# Altium PCB HeartLED.PcbDoc (part 1 of 2)
Units mm, origin at the board's own origin, x right, y up, seen from the top; angles counter-clockwise.
Board outline 86.89 x 91.89 mm, 2 copper layers (Top Layer, Bottom Layer); 133 components, 85 nets, 403 pads, 64 vias.
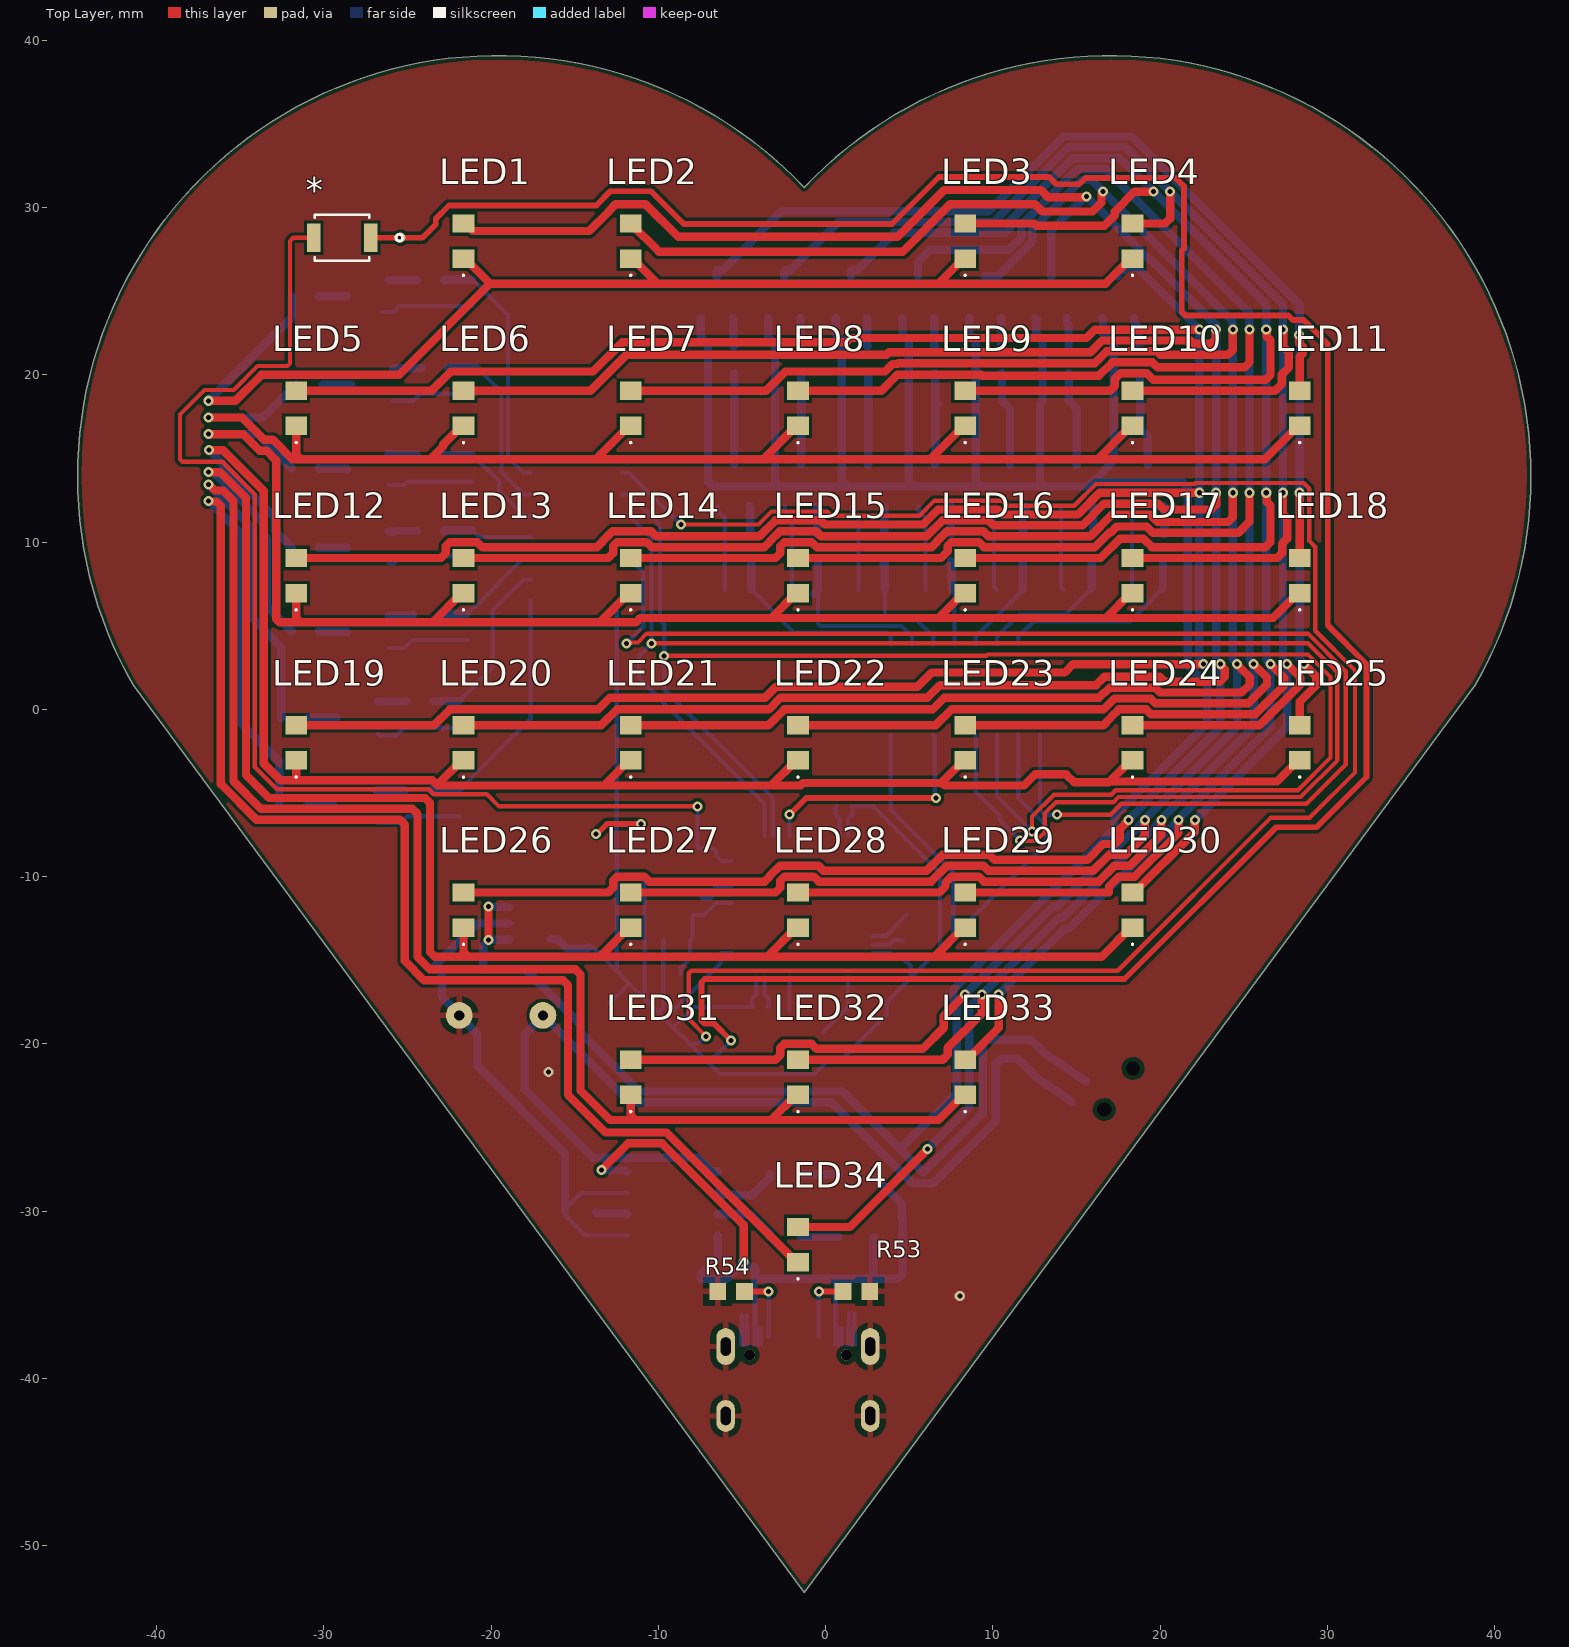
[diagram p0: Top Layer view]
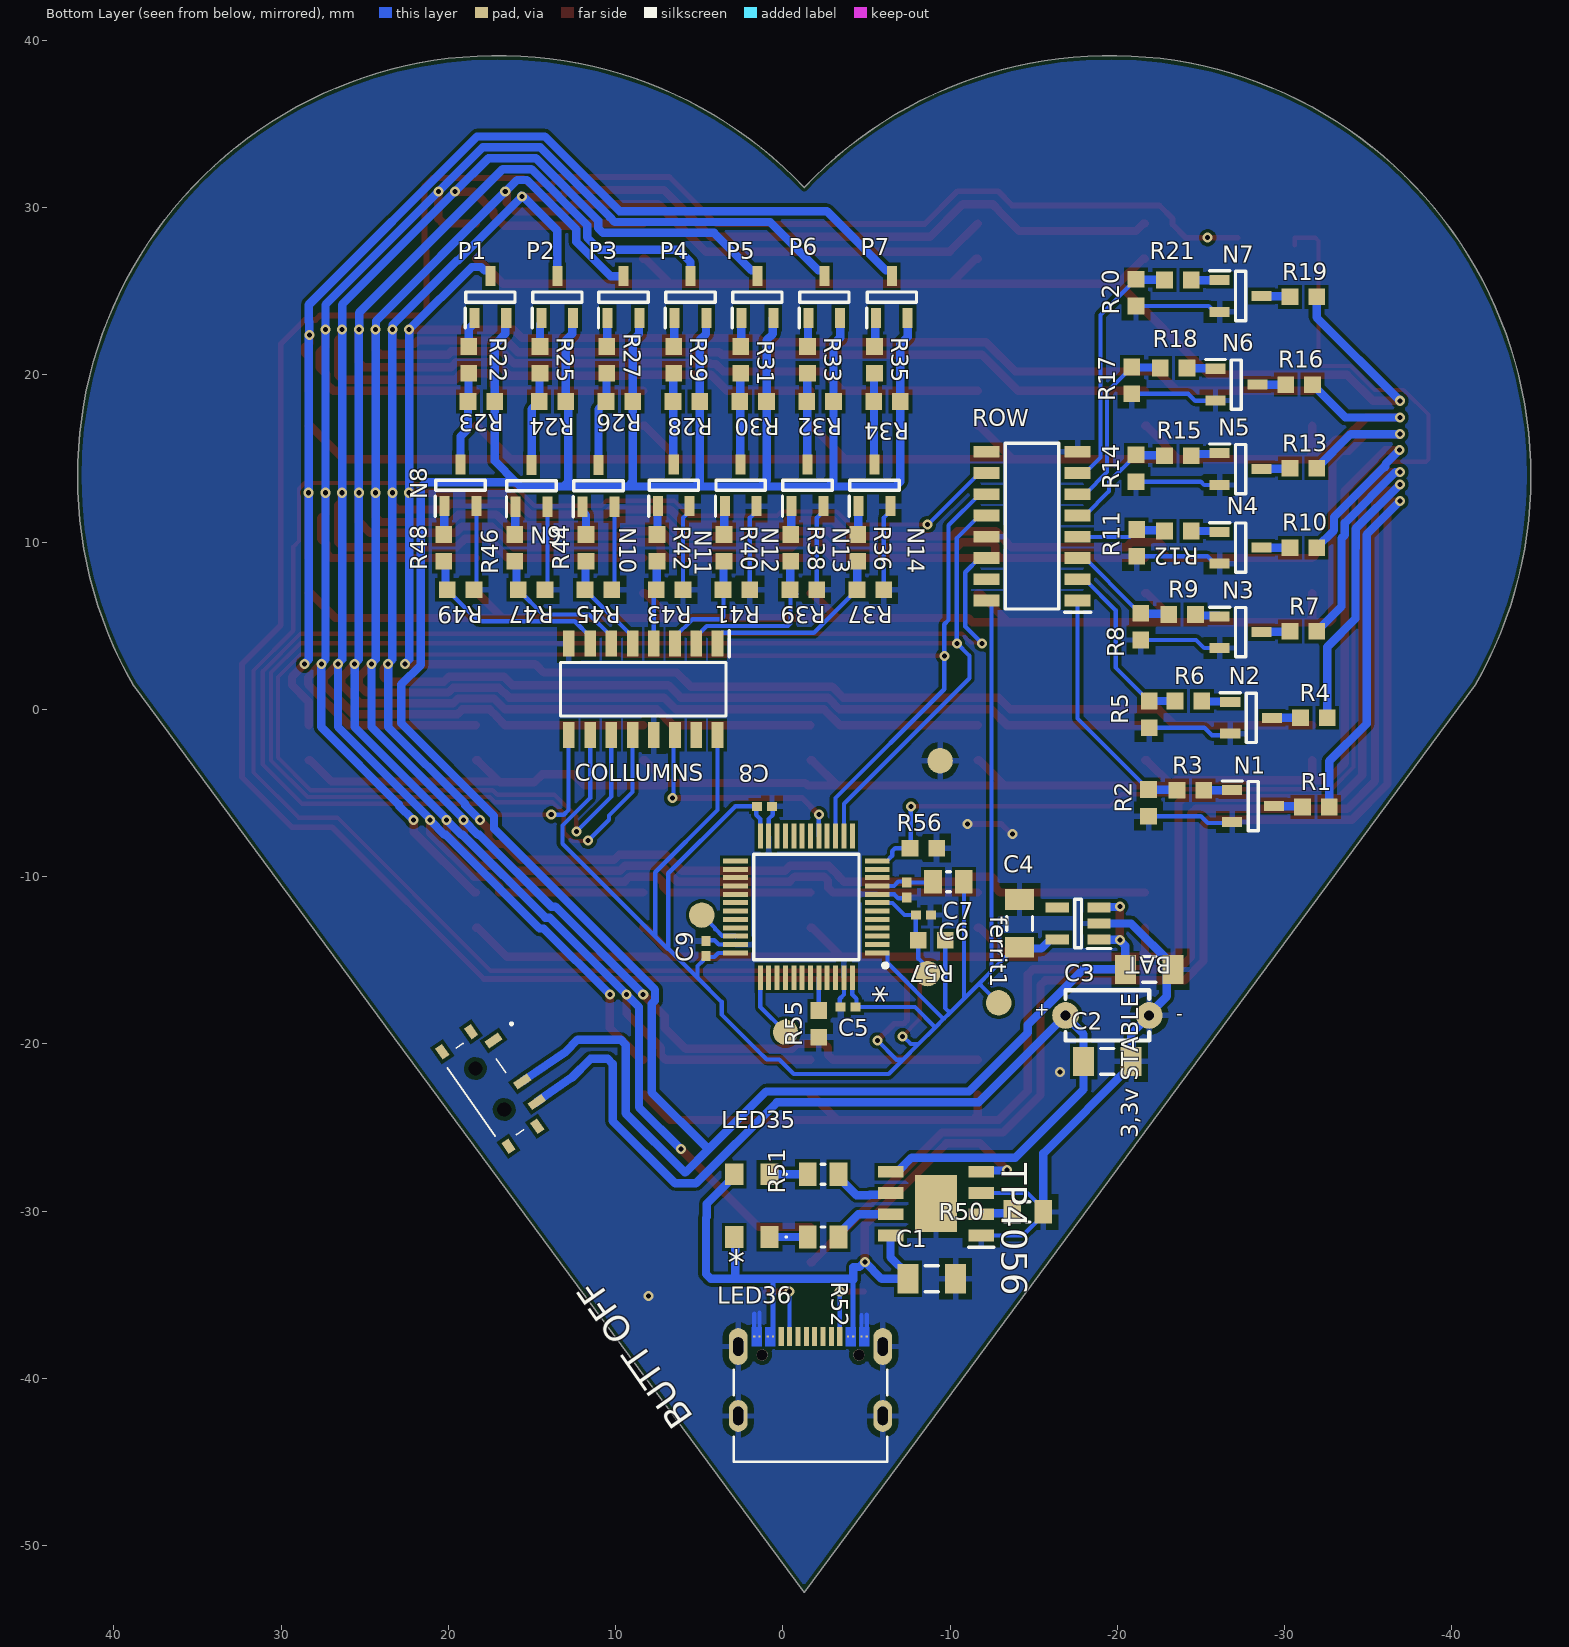
[diagram p1: Bottom Layer view, seen from below]

## Layer stack, top to bottom
Top Solder: solder mask 0.0102, Solder Resist, Dk 3.5
Top Layer: signal copper 0.0356
Dielectric 1: dielectric 0.32, FR-4, Dk 4.8
Bottom Layer: signal copper 0.0356
Bottom Solder: solder mask 0.0102, Solder Resist, Dk 3.5

## Board outline
-1.275,-52.8 -41.4,1.45 cw(c-19.571,13.942) -1.275,31.2 cw(c17.021,13.942) 38.85,1.45

## Design rules (kind name [scope] priority, off if disabled: settings)
AcuteAngle [All] p1: minimum=3.50000000000000E+0001 checktracksonly=FALSE
BoardOutlineClearance "BoardOutlineClearance 1" [All] p1: gap=0.25 ignorepadtopadclearanceinfootprint=FALSE except(0: Arc-SplitContinuation Track-SplitContinuation SMDPad-SplitContinuation THPad-SplitContinuation Via-SplitContinuation Fill-SplitContinuation Poly-SplitContinuation Region-SplitContinuation Text-SplitContinuation) // Milling
BoardOutlineClearance "BoardOutlineClearance 2" [All] p2: gap=0.4 ignorepadtopadclearanceinfootprint=FALSE except(0: Arc-SplitContinuation Track-SplitContinuation SMDPad-SplitContinuation THPad-SplitContinuation Via-SplitContinuation Fill-SplitContinuation Poly-SplitContinuation Region-SplitContinuation Text-SplitContinuation) // V-Cut
Clearance "Clearance-2 1 Oz" [All] p1: gap=0.15 ignorepadtopadclearanceinfootprint=FALSE except(0.2: Arc-Fill Arc-Poly Track-Fill Track-Poly SMDPad-Fill SMDPad-Poly THPad-Fill THPad-Poly Via-Fill Via-Poly Fill-Fill Fill-Poly Poly-Poly; 0.25: Arc-Hole Track-Hole SMDPad-Hole THPad-Hole Via-Hole Fill-Hole Poly-Hole Region-Hole Text-Hole) // Advance
DiffPairsRouting "DiffPairsRouting 1 Oz" [All] p1: maxlimit=0.254 minlimit=0.2 mostfreqgap=0.254 toplayer_minwidth=0.2 toplayer_maxwidth=0.381 toplayer_prefwidth=0.381 bottomlayer_minwidth=0.2 bottomlayer_maxwidth=0.381 bottomlayer_prefwidth=0.381 maxuncoupledlength=12.7
DiffPairsRouting "DiffPairsRouting 1/2 Oz" [All] p2: maxlimit=0.254 minlimit=0.1 mostfreqgap=0.254 toplayer_minwidth=0.1 toplayer_maxwidth=0.381 toplayer_prefwidth=0.381 bottomlayer_minwidth=0.1 bottomlayer_maxwidth=0.381 bottomlayer_prefwidth=0.381 maxuncoupledlength=12.7
HoleSize "Minimum HoleSize" [IsPad] p1: absolutevalues=TRUE maxlimit=5.9 minlimit=0.6 maxpercent=80.000 minpercent=20.000
HoleSize "Minimum HoleSize VIA 1" [IsVia] p2: absolutevalues=TRUE maxlimit=5.9 minlimit=0.3 maxpercent=80.000 minpercent=20.000 // Standart
HoleSize "Minimum HoleSize VIA 2" [IsVia] p3: absolutevalues=TRUE maxlimit=5.9 minlimit=0.2 maxpercent=80.000 minpercent=20.000 // Advance
HoleToHoleClearance Hole2HoleClearance [All] p1: gap=0.25 allowstackedmicrovias=FALSE
MinimumAnnularRing "Minimum AR VIA Standart" [IsVia] p1: minimumring=0.15
MinimumAnnularRing "Minimum AR PAD Standart" [IsPAD] p2: minimumring=0.2
MinimumAnnularRing "Minimum AR VIA Advance" [IsVia] p3: minimumring=0.1
MinimumAnnularRing "Minimum AR PAD Advance" [IsPAD] p4: minimumring=0.15
MinimumSolderMaskSliver "SolderMask Bridge Standart" [All] p1: minsoldermaskwidth=0.15 // All Masks
MinimumSolderMaskSliver "SolderMask Bridge Advance" [All] p2: minsoldermaskwidth=0.1 // Mask LDI
PlaneClearance "PlaneClearance 1 Oz" [All] p1: clearance=0.2
PlaneConnect "TermalConnect-2 1 Oz" [All] p1: pad.planeconnectstyle=Relief pad.reliefexpansion=0.15 pad.reliefentries=4 pad.reliefconductorwidth=0.2 pad.reliefairgap=0.2 via.planeconnectstyle=Direct via.reliefexpansion=0.15 via.reliefentries=4 via.reliefconductorwidth=0.15 via.reliefairgap=0.15 // Advance
PolygonConnect "PolygonConnect 3 Oz" [All] p1: thpad.connectstyle=Relief thpad.reliefconductorwidth=0.35 thpad.reliefentries=4 thpad.polygonreliefangle="90 Angle" thpad.airgapwidth=0.35 smdpad.connectstyle=Relief smdpad.reliefconductorwidth=0.35 smdpad.reliefentries=4 smdpad.polygonreliefangle="90 Angle" smdpad.airgapwidth=0.35 via.connectstyle=Direct via.reliefconductorwidth=0.254 via.reliefentries=4 via.polygonreliefangle="90 Angle" via.airgapwidth=0.254
PolygonConnect "PolygonConnect 2 Oz" [All] p2: thpad.connectstyle=Relief thpad.reliefconductorwidth=0.3 thpad.reliefentries=4 thpad.polygonreliefangle="90 Angle" thpad.airgapwidth=0.3 smdpad.connectstyle=Relief smdpad.reliefconductorwidth=0.3 smdpad.reliefentries=4 smdpad.polygonreliefangle="90 Angle" smdpad.airgapwidth=0.3 via.connectstyle=Direct via.reliefconductorwidth=0.254 via.reliefentries=4 via.polygonreliefangle="90 Angle" via.airgapwidth=0.254
PolygonConnect "PolygonConnect-1 1 Oz" [All] p3: thpad.connectstyle=Relief thpad.reliefconductorwidth=0.2 thpad.reliefentries=4 thpad.polygonreliefangle="90 Angle" thpad.airgapwidth=0.2 smdpad.connectstyle=Relief smdpad.reliefconductorwidth=0.2 smdpad.reliefentries=4 smdpad.polygonreliefangle="90 Angle" smdpad.airgapwidth=0.2 via.connectstyle=Direct via.reliefconductorwidth=0.254 via.reliefentries=4 via.polygonreliefangle="90 Angle" via.airgapwidth=0.254 // Standart
PolygonConnect "PolygonConnect-2 1 Oz" [All] p4: thpad.connectstyle=Relief thpad.reliefconductorwidth=0.15 thpad.reliefentries=4 thpad.polygonreliefangle="90 Angle" thpad.airgapwidth=0.15 smdpad.connectstyle=Relief smdpad.reliefconductorwidth=0.15 smdpad.reliefentries=4 smdpad.polygonreliefangle="90 Angle" smdpad.airgapwidth=0.15 via.connectstyle=Direct via.reliefconductorwidth=0.254 via.reliefentries=4 via.polygonreliefangle="90 Angle" via.airgapwidth=0.254 // Advance
PolygonConnect "PolygonConnect-1 1/2 Oz" [All] p5: thpad.connectstyle=Relief thpad.reliefconductorwidth=0.15 thpad.reliefentries=4 thpad.polygonreliefangle="90 Angle" thpad.airgapwidth=0.2 smdpad.connectstyle=Relief smdpad.reliefconductorwidth=0.2 smdpad.reliefentries=4 smdpad.polygonreliefangle="90 Angle" smdpad.airgapwidth=0.2 via.connectstyle=Direct via.reliefconductorwidth=0.254 via.reliefentries=4 via.polygonreliefangle="90 Angle" via.airgapwidth=0.254 // Standart
PolygonConnect "PolygonConnect-2 1/2 Oz" [All] p6: thpad.connectstyle=Relief thpad.reliefconductorwidth=0.125 thpad.reliefentries=4 thpad.polygonreliefangle="90 Angle" thpad.airgapwidth=0.15 smdpad.connectstyle=Relief smdpad.reliefconductorwidth=0.125 smdpad.reliefentries=4 smdpad.polygonreliefangle="90 Angle" smdpad.airgapwidth=0.15 via.connectstyle=Direct via.reliefconductorwidth=0.254 via.reliefentries=4 via.polygonreliefangle="90 Angle" via.airgapwidth=0.254 // Advance
RoutingCorners [All] p1 off: cornerstyle=45-Degree minsetback=2.54 maxsetback=2.54
RoutingVias [All] p1: holewidth=0.3 width=0.6 viastyle="Through Hole" minholewidth=0.2 minwidth=0.4 maxholewidth=5.9 maxwidth=6.4
SilkToSilkClearance Silk2SilkClearance [All] p1 off: silktosilkclearance=0.15
SilkToSolderMaskClearance Silk2SolderMaskClearance [IsPad] p1 off: minsilkscreentomaskgap=0.15 clearancetoexposedcopper=TRUE
SolderMaskExpansion SolderMaskExpansion-1 [All] p1: expansion=0.05 istentingtop=FALSE // Standart
SolderMaskExpansion "SolderMaskExpansion LDI" [All] p2: expansion=0.025 istentingtop=FALSE // Advance
SupplyNets "Schematic Supply Nets_2" [InNet('+3.7v')] p1: voltage=0.000
SupplyNets "Schematic Supply Nets_1" [InNet('GND')] p2: voltage=0.000
SupplyNets "Schematic Supply Nets" [InNet('+3.3v')] p3: voltage=0.000
UnRoutedNet [All] p1: checkbadconnections=TRUE
Width "Width 1 Oz" [All] p1: maxlimit=10 minlimit=0.15 preferedwidth=0.2 checkconnectedcopper=TRUE
20 further rules are at their usual default settings.

## Components (designator, comment, footprint, x,y, rotation, side; value= is the part's Value field where it differs from the comment)
"3,3v STABLE" "ME6212C33M5G" ME6212C33M5G/3.3 -17.65,-12.8 r0 bottom
* "STM32F103C8T6" STM32F103C8T6 -1.4,-11.812 r0 bottom
* "TYPE-C" USB-C -1.65,-41.05 r180 bottom
* "B3U-1000P BUTTON MOD" "B3U-1000P BUTTON MOD" -28.9,28.2 r180 top
BAT "BATTERY" BATTERY -19.4,-18.3 r180 bottom
"BUTT OFF" "MSK12C02 BUTTON" "MSK12C02 BUTTON" 17.525,-22.7 r235 bottom
C1 "10 мкФ" C1206 -8.9,-34.05 r0 bottom
C2 "10 мкФ" C1206 -19.4,-21.05 r0 bottom
C3 "10 мкФ" C1206 -21.9,-15.55 r0 bottom
C4 "10 мкФ" C1206 -14.15,-12.8 r270 bottom
C5 "0.1 мкФ" C0402 -3.9,-17.8 r0 bottom
C6 "0.1 мкФ" C0402 -8.4,-12.3 r180 bottom
C7 "0.1 мкФ" C0402 -7.4,-10.8 r270 bottom
C8 "0.1 мкФ" C0402 1.1,-5.8 r0 bottom
C9 "0.1 мкФ" C0402 4.6,-14.3 r270 bottom
COLLUMNS "74HC595D" 74HC595D 8.35,1.2 r270 bottom
ferrit1 "ferrit" R0805 -9.9,-10.3 r0 bottom value="1 Ом"
LED1 "LED_RED" LED_RED -21.65,28 r90 top
LED2 "LED_RED" LED_RED -11.65,28 r90 top
LED3 "LED_RED" LED_RED 8.35,28 r90 top
LED4 "LED_RED" LED_RED 18.35,28 r90 top
LED5 "LED_RED" LED_RED -31.65,18 r90 top
LED6 "LED_RED" LED_RED -21.65,18 r90 top
LED7 "LED_RED" LED_RED -11.65,18 r90 top
LED8 "LED_RED" LED_RED -1.65,18 r90 top
LED9 "LED_RED" LED_RED 8.35,18 r90 top
LED10 "LED_RED" LED_RED 18.35,18 r90 top
LED11 "LED_RED" LED_RED 28.35,18 r90 top
LED12 "LED_RED" LED_RED -31.65,8 r90 top
LED13 "LED_RED" LED_RED -21.65,8 r90 top
LED14 "LED_RED" LED_RED -11.65,8 r90 top
LED15 "LED_RED" LED_RED -1.65,8 r90 top
LED16 "LED_RED" LED_RED 8.35,8 r90 top
LED17 "LED_RED" LED_RED 18.35,8 r90 top
LED18 "LED_RED" LED_RED 28.35,8 r90 top
LED19 "LED_RED" LED_RED -31.65,-2 r90 top
LED20 "LED_RED" LED_RED -21.65,-2 r90 top
LED21 "LED_RED" LED_RED -11.65,-2 r90 top
LED22 "LED_RED" LED_RED -1.65,-2 r90 top
LED23 "LED_RED" LED_RED 8.35,-2 r90 top
LED24 "LED_RED" LED_RED 18.35,-2 r90 top
LED25 "LED_RED" LED_RED 28.35,-2 r90 top
LED26 "LED_RED" LED_RED -21.65,-12 r90 top
LED27 "LED_RED" LED_RED -11.65,-12 r90 top
LED28 "LED_RED" LED_RED -1.65,-12 r90 top
LED29 "LED_RED" LED_RED 8.35,-12 r90 top
LED30 "LED_RED" LED_RED 18.35,-12 r90 top
LED31 "LED_RED" LED_RED -11.65,-22 r90 top
LED32 "LED_RED" LED_RED -1.65,-22 r90 top
LED33 "LED_RED" LED_RED 8.35,-22 r90 top
LED34 "LED_RED" LED_RED -1.65,-32 r90 top
LED35 "LED_RED" LED_RED 1.85,-27.8 r0 bottom
LED36 "LED_RED" LED_RED 1.85,-31.55 r0 bottom
N1 "A03400 n-channel" A03400 -28.114,-5.786 r180 bottom
N2 "A03400 n-channel" A03400 -27.996,-0.504 r180 bottom
N3 "A03400 n-channel" A03400 -27.364,4.614 r180 bottom
N4 "A03400 n-channel" A03400 -27.364,9.664 r180 bottom
N5 "A03400 n-channel" A03400 -27.364,14.364 r180 bottom
N6 "A03400 n-channel" A03400 -27.114,19.414 r180 bottom
N7 "A03400 n-channel" A03400 -27.364,24.714 r180 bottom
N8 "A03400 n-channel" A03400 19.275,13.4 r90 bottom
N9 "A03400 n-channel" A03400 15.025,13.364 r90 bottom
N10 "A03400 n-channel" A03400 11.025,13.364 r90 bottom
N11 "A03400 n-channel" A03400 6.525,13.4 r90 bottom
N12 "A03400 n-channel" A03400 2.525,13.4 r90 bottom
N13 "A03400 n-channel" A03400 -1.475,13.4 r90 bottom
N14 "A03400 n-channel" A03400 -5.475,13.4 r90 bottom
P1 "AO3401 p-channel" AO3401 17.489,24.65 r90 bottom
P2 "AO3401 p-channel" AO3401 13.489,24.65 r90 bottom
P3 "AO3401 p-channel" AO3401 9.525,24.65 r90 bottom
P4 "AO3401 p-channel" AO3401 5.525,24.65 r90 bottom
P5 "AO3401 p-channel" AO3401 1.525,24.65 r90 bottom
P6 "AO3401 p-channel" AO3401 -2.475,24.65 r90 bottom
P7 "AO3401 p-channel" AO3401 -6.511,24.65 r90 bottom
R1 "240 Ом" R0603 -31.864,-5.836 r180 bottom value="160 Ом"
R2 "10 кОм" R0603 -21.864,-5.586 r90 bottom
R3 "100 Ом" R0603 -24.364,-4.836 r180 bottom
R4 "240 Ом" R0603 -31.746,-0.504 r180 bottom value="160 Ом"
R5 "10 кОм" R0603 -21.9,-0.3 r90 bottom
R6 "100 Ом" R0603 -24.246,0.496 r180 bottom
R7 "240 Ом" R0603 -31.114,4.664 r180 bottom value="160 Ом"
R8 "10 кОм" R0603 -21.4,4.95 r90 bottom
R9 "100 Ом" R0603 -23.864,5.664 r180 bottom
R10 "240 Ом" R0603 -31.114,9.664 r180 bottom value="160 Ом"
R11 "10 кОм" R0603 -21.15,9.95 r90 bottom
R12 "100 Ом" R0603 -23.614,10.664 r180 bottom
R13 "240 Ом" R0603 -31.114,14.414 r180 bottom value="160 Ом"
R14 "10 кОм" R0603 -21.114,14.414 r90 bottom
R15 "100 Ом" R0603 -23.614,15.164 r180 bottom
R16 "240 Ом" R0603 -30.864,19.414 r180 bottom value="160 Ом"
R17 "10 кОм" R0603 -20.864,19.664 r90 bottom
R18 "100 Ом" R0603 -23.364,20.414 r0 bottom
R19 "240 Ом" R0603 -31.114,24.664 r180 bottom value="160 Ом"
R20 "10 кОм" R0603 -21.114,24.914 r90 bottom
R21 "100 Ом" R0603 -23.614,25.664 r180 bottom
R22 "100 Ом" R0603 18.775,20.9 r270 bottom
R23 "10 кОм" R0603 18.025,18.4 r0 bottom
R24 "10 кОм" R0603 13.775,18.4 r0 bottom
R25 "100 Ом" R0603 14.525,20.9 r270 bottom
R26 "10 кОм" R0603 9.775,18.4 r0 bottom
R27 "100 Ом" R0603 10.525,20.9 r270 bottom
R28 "10 кОм" R0603 5.775,18.4 r0 bottom
R29 "100 Ом" R0603 6.525,20.9 r270 bottom
R30 "10 кОм" R0603 1.775,18.4 r0 bottom
R31 "100 Ом" R0603 2.525,20.9 r270 bottom
R32 "10 кОм" R0603 -2.225,18.4 r0 bottom
R33 "100 Ом" R0603 -1.475,20.9 r270 bottom
R34 "10 кОм" R0603 -6.225,18.4 r0 bottom
R35 "100 Ом" R0603 -5.475,20.9 r270 bottom
R36 "100 Ом" R0603 -4.475,9.65 r270 bottom
R37 "10 кОм" R0603 -5.225,7.15 r0 bottom
R38 "100 Ом" R0603 -0.475,9.65 r270 bottom
R39 "10 кОм" R0603 -1.225,7.15 r0 bottom
R40 "100 Ом" R0603 3.525,9.65 r270 bottom
R41 "10 кОм" R0603 2.775,7.15 r0 bottom
R42 "100 Ом" R0603 7.525,9.65 r270 bottom
R43 "10 кОм" R0603 6.775,7.15 r0 bottom
R44 "100 Ом" R0603 11.775,9.65 r270 bottom
R45 "10 кОм" R0603 11.025,7.15 r0 bottom
R46 "100 Ом" R0603 16.025,9.65 r270 bottom
R47 "10 кОм" R0603 15.025,7.15 r0 bottom
R48 "100 Ом" R0603 20.275,9.65 r270 bottom
R49 "10 кОм" R0603 19.275,7.15 r0 bottom
R50 "4.7 кОм" R0805 -14.65,-30.05 r180 bottom
R51 "1 кОм" R0805 -2.4,-27.8 r180 bottom
R52 "1 кОм" R0805 -2.4,-31.55 r180 bottom
R53 "5.1 кОм" R0603 1.85,-34.8 r0 top
R54 "5.1 кОм" R0603 -5.65,-34.8 r0 top
R55 "10 кОм" R0603 -2.15,-18.8 r90 bottom
R56 "10 кОм" R0603 -8.4,-8.3 r0 bottom
R57 "10 кОм" R0603 -8.9,-13.8 r0 bottom
ROW "74HC595D" 74HC595D -14.9,10.95 r0 bottom
TP4056 "TP4056" TP4056 -9.15,-29.55 r0 bottom

## Footprints (in the part's own frame and the unit in brackets; to place one, negate y for a bottom-side part, rotate by r counter-clockwise, add the part's x,y. Pads: shape width x height; smd on the part's side, far side on the other; paste and mask are expansions set on the pad)
74HC595D [mm]
  rect 1.55x0.7 smd: 1(-2.725,4.445) 2(-2.725,3.175) 3(-2.725,1.905) 4(-2.725,0.635) 5(-2.725,-0.635) 6(-2.725,-1.905) 7(-2.725,-3.175) 8(-2.725,-4.445) 9(2.725,-4.445) 10(2.725,-3.175) 11(2.725,-1.905) 12(2.725,-0.635) 13(2.725,0.635) 14(2.725,1.905) 15(2.725,3.175) 16(2.725,4.445)
  silkscreen extent -3.5,-4.95 1.6,5.15
A03400 [mm]
  rect 1.2x0.6 smd: 1(-1.25,0.95) 2(-1.25,-0.95) 3(1.25,0)
  silkscreen extent -1.85,-1.48 0.3,1.5
AO3401 [mm]
  rect 1.2x0.6 smd: 1(-1.25,0.95) 2(-1.25,-0.95) 3(1.25,0)
  silkscreen extent -1.85,-1.48 0.3,1.5
"B3U-1000P BUTTON MOD" [mm]
  rect 0.8x1.7 smd paste+0 mask+0: 1(-1.7,0) 2(1.7,0)
  silkscreen extent -3.61,-1.38 1.63,1.38
BATTERY [mm]
  round 1.6 hole 0.6: 1(-2.5,0) 2(2.5,0)
  silkscreen extent -2.5,-1.5 2.5,1.5
C0402 [mm]
  rect 0.6x0.55 smd: 1(-0.45,0) 2(0.45,0)
  body extent -0.55,-0.27 0.55,0.28, height 0.4
C1206 [mm]
  rect 1.25x1.75 smd: 1(-1.425,0) 2(1.425,0)
  silkscreen extent -0.4,-0.77 0.4,0.77, body extent -1.6,-0.85 1.6,0.85, height 0.6
LED_RED [mm]
  rect 1.1x1.3 smd: 1(-1.05,0) 2(1.05,0)
  silkscreen extent -2.1,-0.05 -2,0.05
ME6212C33M5G/3.3 [mm]
  rect 1.4x0.6 smd: 1(-1.25,0.95) 2(-1.25,0) 3(-1.25,-0.95) 4(1.25,-0.95) 5(1.25,0.95)
  silkscreen extent -1.95,-1.45 0.2,1.5
"MSK12C02 BUTTON" [mm]
  rect 0.5x1 smd: A1(-2.25,1.85) B1(0.75,1.85) C1(2.25,1.85)
  round 0.425 hole 0.85 unplated: MH1(-1.5,0) MH2(1.5,0)
  rect 0.8x0.5 smd: MP1(3.45,1.05) MP2(3.45,-1.05) MP3(-3.45,-1.05) MP4(-3.45,1.05)
  silkscreen extent -3.15,-1.35 3.15,3.35
R0603 [mm]
  rect 1x1 smd: 1(-0.8,0) 2(0.8,0)
  body extent -0.85,-0.48 0.85,0.47, height 0.5
R0805 [mm] "Chip Resistor, 2-Leads, Body 2,10x1,30mm, IPC Medium Density"
  rect 1.05x1.4 smd: 1(-0.925,0) 2(0.925,0)
  silkscreen extent -0.1,-0.6 0.1,0.6, body extent -1.15,-0.7 1.15,0.7, height 0.76
STM32F103C8T6 [mm]
  rect 1.475x0.3 smd: 1(-4.238,2.75) 2(-4.238,2.25) 3(-4.238,1.75) 4(-4.238,1.25) 5(-4.238,0.75) 6(-4.238,0.25) 7(-4.238,-0.25) 8(-4.238,-0.75) 9(-4.238,-1.25) 10(-4.238,-1.75) 11(-4.238,-2.25) 12(-4.238,-2.75) 25(4.238,-2.75) 26(4.238,-2.25) 27(4.238,-1.75) 28(4.238,-1.25) 29(4.238,-0.75) 30(4.238,-0.25) 31(4.238,0.25) 32(4.238,0.75) 33(4.238,1.25) 34(4.238,1.75) 35(4.238,2.25) 36(4.238,2.75)
  rect 0.3x1.475 smd: 13(-2.75,-4.238) 14(-2.25,-4.238) 15(-1.75,-4.238) 16(-1.25,-4.238) 17(-0.75,-4.238) 18(-0.25,-4.238) 19(0.25,-4.238) 20(0.75,-4.238) 21(1.25,-4.238) 22(1.75,-4.238) 23(2.25,-4.238) 24(2.75,-4.238) 37(2.75,4.238) 38(2.25,4.238) 39(1.75,4.238) 40(1.25,4.238) 41(0.75,4.238) 42(0.25,4.238) 43(-0.25,4.238) 44(-0.75,4.238) 45(-1.25,4.238) 46(-1.75,4.238) 47(-2.25,4.238) 48(-2.75,4.238)
  silkscreen extent -4.85,-3.15 3.15,3.62
TP4056 [mm]
  rect 1.525x0.7 smd: 1(-2.712,1.905) 2(-2.712,0.635) 3(-2.712,-0.635) 4(-2.712,-1.905) 5(2.712,-1.905) 6(2.712,-0.635) 7(2.712,0.635) 8(2.712,1.905)
  rect 2.513x3.402 smd: 9(0,0)
  silkscreen extent -3.47,2.61 -1.95,2.61
USB-C [mil]
  round 26 / inner round 60 / far side round 26 hole 26 unplated paste-99999 mask+0: 29(-113.78,96.55) 30(113.78,96.55)
  rect 5x5 smd paste-2.5 mask-2.5: A1(-132.3,139.5) A4(-100.61,139.5) A9(100.61,139.5) A12(132.3,139.5) B1(120.3,139.5) B4(88.61,139.5) B9(-88.61,139.5) B12(-120.3,139.5)
  rect 12x45 smd paste+0 mask+0: A5(-49.22,139.5) A6(-9.85,139.5) A7(9.84,139.5) A8(-68.91,139.5) B5(68.91,139.5) B6(29.53,139.5) B7(-29.54,139.5) B8(49.22,139.5)
  oval 44x87 / inner round 60 / far side oval 44x87 hole 23.62 slot 43.31 at 90 deg paste-99999 mask+0: S1(-170.08,116.23) S2(170.08,116.23)
  oval 44x75 / inner round 60 / far side oval 44x75 hole 23.62 slot 43.31 at 90 deg paste-99999 mask+0: S3(-170.08,-47.15) S4(170.08,-47.15)
  Top Layer region: -114.3,117 -138.3,117 -138.3,162 -114.3,162
  Top Layer region: 114.3,162 138.3,162 138.3,117 114.3,117
  Top Layer region: 82.61,162 106.61,162 106.61,117 82.61,117
  Top Layer region: -106.61,117 -106.61,162 -82.61,162 -82.61,117
  silkscreen extent -181,-155 181,61

## Part data
C1 C2 C3 C4: library part "10 мкФ 1% X7R 10В 1206", "1206 X5R", Power/Voltage=10В, PrimaryValue=10, Tolerance=1%, UnitsValue=мкФ, ID=CCS00422, Part Number="10 мкФ 1% X7R 10В 1206", Type=X7R, Корпус=1206
C5 C6 C7 C8 C9: library part "0.1 мкФ 10% X7R 16В 0402", "0402", Power/Voltage=16В, PrimaryValue=0.1, Tolerance=10%, UnitsValue=мкФ, ID=CCS00423, Part Number="0.1 мкФ 10% X7R 16В 0402", Type=X7R, Корпус=0402
ferrit1: library part "1 Ом 1% 0.125 Вт 0805", "0805", Power/Voltage="0.125 Вт", PrimaryValue=1, Tolerance=1%, UnitsValue=Ом, ID=RS00193, Part Number="1 Ом 1% 0.125 Вт 0805", Корпус=0805
R1 R4 R7 R10 R13 R16 R19: library part "160 Ом 1% 0.063 Вт 0603", "0603", Power/Voltage="0.063 Вт", PrimaryValue=160, Tolerance=1%, UnitsValue=Ом, ID=RS00150, Part Number="160 Ом 1% 0.063 Вт 0603", Корпус=0603
R2 R5 R8 R11 R14 R17 R20 R23 R24 R26 R28 R30 R32 R34 R37 R39 R41 R43 R45 R47 R49 R55 R56 R57: library part "10 кОм 1% 0.063 Вт 0603", "0603", Power/Voltage="0.063 Вт", PrimaryValue=10, Tolerance=1%, UnitsValue=кОм, ID=RS00097, Part Number="10 кОм 1% 0.063 Вт 0603", Корпус=0603
R3 R6 R9 R12 R15 R18 R21 R22 R25 R27 R29 R31 R33 R35 R36 R38 R40 R42 R44 R46 R48: library part "100 Ом 1% 0.063 Вт 0603", "0603", Power/Voltage="0.063 Вт", PrimaryValue=100, Tolerance=1%, UnitsValue=Ом, ID=RS00145, Part Number="100 Ом 1% 0.063 Вт 0603", Корпус=0603
R50: library part "4.7 кОм 1% 0.125 Вт 0805", "0805", Power/Voltage="0.125 Вт", PrimaryValue=4.7, Tolerance=1%, UnitsValue=кОм, ID=RS00233, Part Number="4.7 кОм 1% 0.125 Вт 0805", Корпус=0805
R51 R52: library part "1 кОм 1% 0.125 Вт 0805", "0805", Power/Voltage="0.125 Вт", PrimaryValue=1, Tolerance=1%, UnitsValue=кОм, ID=RS00217, Part Number="1 кОм 1% 0.125 Вт 0805", Корпус=0805
R53 R54: library part "5.1 кОм 1% 0.063 Вт 0603", "1206", Power/Voltage="0.063 Вт", PrimaryValue=5.1, Tolerance=1%, UnitsValue=кОм, ID=RS00042, Part Number="5.1 кОм 1% 0.063 Вт 0603", Корпус=0603

## Free pads (board coordinates)
  round 1.5 smd far side: 4(-0.15,-19.3)
  round 1.524 smd far side: 5(-8.65,-15.8) 6(4.85,-12.3) 7(-12.9,-17.55) 8(-9.4,-3.075)

## Via types
v1: diameter 0.6, hole 0.3, Top Layer to Bottom Layer, 64 vias

## Nets (pads, with @x,y where several pads share a name; then routed paths per layer and width w, separated by ;. In a path a pad name is that pad's centre, name@x,y a point inside that pad or via, vN(x,y) a via of type N, cw(c..) or ccw(c..) an arc to the next point about the centre after c; other vN are vias at no path point)
+3.3v: "3,3v STABLE.5" *.1 *.24 *.36 *.48 C4.2 C5.1 C8.2 C9.2 COLLUMNS.10 COLLUMNS.16 ferrit1.1 pad.7 R57.1 ROW.10 ROW.16 | length 385.2
  Top Layer w0.254: v1(-8.65,11.05) -3.999,11.05 -3.222,11.827 0.102,11.827 0.35,11.579 5.61,11.579 6.508,12.477 10.55,12.477 10.85,12.177 14.868,12.177 16.168,13.477 22.061,13.477 22.111,13.527 28.589,13.527 28.927,13.189 28.927,10.065 29.277,9.715 29.277,4.702 31.65,2.329 31.65,-3.775 28.95,-6.475 26.625,-6.475 17.472,-15.628 -8.029,-15.628 -8.178,-15.777 -8.178,-18.522 v1(-7.15,-19.55)
  Top Layer w0.35: *.1@-27.2,28.2 v1(-25.4,28.2) -24.092,28.2 -23.305,28.987 -23.305,29.338 -22.517,30.125 -13.7,30.125 -13.7,30.145 -12.87,30.975 -10.43,30.975 -8.48,29.025 3.978,29.025 6.778,31.825 13.367,31.825 13.8,31.392 15.158,31.392 15.541,31.775 20.942,31.775 21.425,31.292 21.425,27.553 21.3,27.428 21.3,23.755 21.505,23.55 27.667,23.55 27.94,23.277 28.589,23.277 30.025,21.841 30.025,5.025 32.35,2.7 32.35,-4.05 29.35,-7.05 26.95,-7.05 17.875,-16.125 -7.22,-16.125 -7.425,-16.33 -7.425,-18.595 -7.22,-18.8 -6.65,-18.8 v1(-5.65,-19.8)
  Bottom Layer w0.254: C4.2@-14.15,-14.225 -13.9,-14.225 -12.477,-15.648 ; pad.7@-12.9,-17.55 -11.824,-16.474 -11.651,-16.474 ; ROW.16@-12.175,6.505 -12.254,6.505 -12.477,6.282 -12.477,-15.648 ; ROW.10@-12.175,14.125 -11.75,14.125 -8.675,11.05 v1(-8.65,11.05) ; ferrit1.1@-10.825,-10.3 -10.825,-17.3 ; R57.1@-9.7,-13.8 -9.7,-17.85 -9.988,-18.137 ; v1(-7.15,-19.55) -7.188,-19.55 -7.651,-20.012 -8.112,-20.012 ; v1(-5.65,-19.8) -6.8,-20.95 -7.175,-20.95 ; *.1@-5.638,-14.562 -6.226,-14.562 -6.249,-14.585 -6.249,-15.149 -9.612,-18.513 ; *.48@-4.15,-16.05 -4.15,-17.05 -4.4,-17.3 -4.4,-17.75 C5.1@-4.35,-17.8 -7.9,-17.8 -9.112,-19.012 ; *.24@1.35,-7.574 1.35,-6.55 1.6,-6.3 C8.2@1.6,-5.85 ; C8.2@1.55,-5.8 C8.2@1.6,-5.85 ; *.36@2.838,-14.562 3.862,-14.562 4.1,-14.8 4.55,-14.8 C9.2@4.6,-14.75 ; COLLUMNS.16@3.905,-1.525 3.905,-6.014 7.633,-9.742 7.633,-13.583 ; C9.2@4.625,-14.8 4.748,-14.923 4.748,-14.998 5.1,-15.35 5.1,-16.05 ; 6.883,-14.333 7.633,-13.583 ; COLLUMNS.10@11.525,-1.525 11.525,-5.296 13.177,-6.948 13.177,-8.039 7.633,-13.583 ; -12.477,-15.648 -11.651,-16.474 ; -11.651,-16.474 -10.825,-17.3 ; -10.825,-17.3 -9.988,-18.137 ; -9.988,-18.137 -9.612,-18.513 ; -9.612,-18.513 -9.112,-19.012 ; -9.112,-19.012 -8.112,-20.012 ; -8.112,-20.012 -7.175,-20.95 ; -7.175,-20.95 -6.325,-21.8 -0.65,-21.8 0.216,-20.934 0.966,-20.934 1.538,-20.362 3.662,-18.238 3.662,-17.488 5.1,-16.05 ; C8.2@1.6,-5.85 1.65,-5.8 2.85,-5.8 6.85,-9.8 6.85,-14.3 5.1,-16.05
  Bottom Layer w0.5: -16.4,-13.75 -16,-13.75 -15.45,-14.3 -14.225,-14.3 C4.2@-14.15,-14.225
+3.7v: "3,3v STABLE.1" "3,3v STABLE.3" "BUTT OFF.B1" C3.2 P1.2 P2.2 P3.2 P4.2 P5.2 P6.2 P7.2 R23.1 R24.1 R26.1 R28.1 R30.1 R32.1 R34.1 | length 203.7
  Top Layer w0.5: v1(-20.15,-13.8) v1(-20.15,-11.8)
  Bottom Layer w0.5: v1(-20.15,-11.8) -20.131,-11.819 -18.931,-11.819 -18.9,-11.85 ; -18.9,-13.75 -18.931,-13.781 -20.131,-13.781 v1(-20.15,-13.8) -20.15,-13.814 -20.475,-14.139 -20.475,-15.3 C3.2@-20.475,-15.55 -17.953,-15.55 -16.889,-16.614 -14.65,-18.853 -14.65,-19.321 -11.124,-22.847 0.997,-22.847 4.45,-26.3 ; P7.2@-7.461,23.4 -7.461,22.261 -7.025,21.825 R34.1@-7.025,18.4 -7.025,13.618 -6.732,13.325 -2.732,13.325 ; P6.2@-3.425,23.4 -3.425,22.225 -3.025,21.825 R32.1@-3.025,18.4 -3.025,13.618 -2.732,13.325 ; P5.2@0.575,23.4 0.6,23.375 0.6,22.45 0.975,22.075 R30.1@0.975,18.4 0.975,13.693 1.343,13.325 ; P4.2@4.575,23.4 4.6,23.375 4.6,22.45 4.975,22.075 R28.1@4.975,18.4 4.975,13.618 5.268,13.325 ; P3.2@8.575,23.4 8.6,23.375 8.6,22.45 8.975,22.075 R26.1@8.975,18.4 8.975,13.618 9.268,13.325 ; P2.2@12.539,23.4 12.589,23.35 12.589,22.461 12.975,22.075 R24.1@12.975,18.4 12.825,18.25 12.825,13.618 13.118,13.325 ; 15.579,-22.253 15.375,-22.11 13,-20.475 12.275,-19.75 9.693,-19.75 9.4,-20.043 9.4,-24.15 5.866,-27.684 5.834,-27.684 4.45,-26.3 ; P1.2@16.539,23.4 16.589,23.35 16.589,22.461 17.225,21.825 R23.1@17.225,18.4 17.225,14.85 15.95,13.575 ; -2.732,13.325 1.343,13.325 ; 1.343,13.325 5.268,13.325 ; 4.45,-26.3 7.85,-22.9 7.85,-17.618 7.65,-17.418 7.65,-16.76 17.275,-7.135 17.275,-6.375 22.825,-0.825 22.825,1.485 21.65,2.66 21.65,13.282 21.357,13.575 15.95,13.575 ; 5.268,13.325 9.268,13.325 ; 9.268,13.325 13.118,13.325 ; 13.118,13.325 15.7,13.325 15.95,13.575
GND: "3,3v STABLE.2" *.8 *.23 *.35 *.47 *.A1 *.A12 *.B1 *.B12 *.S1 *.S2 *.S3 *.S4 BAT.2 C1.1 C2.1 C3.1 C4.1 C5.2 C6.2 C7.2 C8.1 C9.1 COLLUMNS.8 COLLUMNS.13 N1.2 N2.2 N3.2 N4.2 N5.2 N6.2 N7.2 N8.2 N9.2 N10.2 N11.2 N12.2 N13.2 N14.2 pad.8 R2.1 R5.1 R8.1 R11.1 R14.1 R17.1 R20.1 R37.1 R39.1 R41.1 R43.1 R45.1 R47.1 R49.1 R50.2 R53.2 R54.1 R55.1 R56.1 ROW.8 ROW.13 TP4056.1 TP4056.3 TP4056.9 | length 120.2
  Top Layer w0.35: v1(-13.725,-7.45) -13.663,-7.45 -13.063,-6.85 v1(-11.025,-6.85)
  Bottom Layer w0.254: N1.2@-26.864,-6.736 -26.8,-6.8 -25.4,-6.8 -24.986,-6.386 R2.1@-21.864,-6.386 ; N2.2@-26.746,-1.454 -26.651,-1.55 -25.65,-1.55 -25.2,-1.1 R5.1@-21.9,-1.1 ; N7.2@-26.414,23.764 N7.2@-26.114,23.764 -25.814,23.764 -25.464,24.114 R20.1@-21.114,24.114 ; N3.2@-26.114,3.664 -25.186,3.664 -24.7,4.15 R8.1@-21.4,4.15 ; N4.2@-26.114,8.714 -25.814,8.714 -25.379,9.15 R11.1@-21.15,9.15 ; N5.2@-26.114,13.414 -25.186,13.414 -24.986,13.614 R14.1@-21.114,13.614 ; N6.2@-25.864,18.464 -25.85,18.45 -24.65,18.45 -24.236,18.864 R17.1@-20.864,18.864 ; R50.2@-15.575,-30.05 -15.575,-30.225 -14.345,-31.455 TP4056.1@-11.862,-31.455 ; R50.2@-15.575,-29.875 -14.615,-28.915 TP4056.3@-11.862,-28.915 ; C7.2@-7.4,-11.25 -7.35,-11.3 -6.9,-11.3 -6.662,-11.062 *.8@-5.638,-11.062 ; N14.2@-6.425,12.15 -6.425,11.85 -6.025,11.45 R37.1@-6.025,7.15 ; *.A12@-5.01,-37.507 -5.01,-36.19 ; *.B1@-4.705,-37.507 -4.705,-36.22 ; *.47@-3.65,-16.05 -3.65,-17.05 -3.4,-17.3 -3.4,-17.75 C5.2@-3.45,-17.8 ; N13.2@-2.425,12.15 -2.425,11.85 -2.025,11.45 R39.1@-2.025,7.15 ; C8.1@0.65,-5.8 0.6,-5.85 0.6,-6.3 0.85,-6.55 *.23@0.85,-7.574 ; *.B12@1.405,-37.507 1.405,-36.08 ; N12.2@1.575,12.15 1.575,11.85 1.975,11.45 R41.1@1.975,7.15 ; *.A1@1.71,-37.507 1.71,-36.135 ; *.S1@2.271,-37.507 2.67,-37.906 *.S1@2.67,-38.098 ; *.35@2.838,-14.062 3.838,-14.062 4.1,-13.8 4.55,-13.8 C9.1@4.6,-13.85 ; N11.2@5.575,12.15 5.575,11.85 5.975,11.45 R43.1@5.975,7.15 ; N10.2@10.075,12.114 10.075,7.3 R45.1@10.225,7.15 ; N9.2@14.075,12.114 14.075,7.3 R47.1@14.225,7.15 ; N8.2@18.325,12.15 18.325,7.3 R49.1@18.475,7.15
  Bottom Layer w0.5: C3.1@-23.325,-15.55 -23.325,-15.3 -20.825,-12.8 -18.9,-12.8 ; C3.1@-22.95,-15.925 -22.95,-17.158 -21.9,-18.208 BAT.2@-21.9,-18.3 ; BAT.2@-21.69,-18.09 BAT.2@-21.9,-18.3 ; R50.2@-15.575,-30.05 -15.575,-29.875 -15.575,-26.55 -20.825,-21.3 C2.1@-20.825,-21.05 -20.825,-19.417 -21.9,-18.342 BAT.2@-21.9,-18.3
  other v1: 8.025,-35.075 -16.575,-21.675
Net*_2: *.2@-30.6,28.2 *.12 R56.2 | length 73.8
  Top Layer w0.254: *.2@-30.6,27.75 *.2@-30.6,28.2 -31.825,28.2 -32.025,28 -32.025,20.676 -32.174,20.527 -33.955,20.527 -35.382,19.1 -37.125,19.1 -38.6,17.625 -38.6,14.949 -38.451,14.8 -36.073,14.8 -34.123,12.85 -34.123,-3.442 -32.792,-4.773 -23.725,-4.773 -23.421,-5.077 -20.25,-5.077 -19.527,-5.8 v1(-7.65,-5.8)
  Bottom Layer w0.254: v1(-7.65,-5.8) -7.65,-8.25 R56.2@-7.6,-8.3 -6.719,-8.3 -6.539,-8.48 -6.539,-8.748 -6.226,-9.062 *.12@-5.638,-9.062
Net*_3: *.37 pad.4 | length 3.9
  Bottom Layer w0.254: pad.4@-0.15,-19.3 1.35,-17.8 *.37@1.35,-16.05
Net*_5: *.7 C6.1 pad.5 R57.2 | length 6.4
  Bottom Layer w0.254: pad.5@-8.65,-15.8 -8.65,-15.456 -8.1,-14.906 R57.2@-8.1,-13.8 -7.95,-13.65 C6.1@-7.95,-12.3 -7.269,-12.3 -6.554,-11.585 -5.661,-11.585 *.7@-5.638,-11.562
Net*_9: *.9 C7.1 ferrit1.2 | length 3.5
  Bottom Layer w0.254: ferrit1.2@-8.975,-10.3 -8.925,-10.35 C7.1@-7.4,-10.35 -7.35,-10.3 -6.9,-10.3 -6.638,-10.562 *.9@-5.638,-10.562
Net*_14: *.14 COLLUMNS.12 ROW.12 | length 99.6
  Top Layer w0.254: v1(-10.4,3.95) 28.85,3.95 30.6,2.2 30.6,-3.05 28.408,-5.242 17.515,-5.242 17.207,-5.55 13.784,-5.55 13.1,-6.234 13.1,-7.366 12.589,-7.877 12.111,-7.877 12.1,-7.866 11.666,-7.866 v1(11.639,-7.839)
  Bottom Layer w0.254: ROW.12@-12.175,11.585 -11.75,11.585 -10.4,10.235 v1(-10.4,3.95) -11.15,3.2 -11.15,1.857 -3.65,-5.643 *.14@-3.65,-7.574 ; COLLUMNS.12@8.985,-1.525 8.985,-4.935 10.4,-6.35 10.4,-6.6 v1(11.639,-7.839)